# Altium PCB Two_finger_ASCII2.PcbDoc
Units mm, origin at the board's own origin, x right, y up, seen from the top; angles counter-clockwise.
Board outline 107.17 x 113.57 mm, 2 copper layers (Top Layer, Bottom Layer); 8 components, 96 nets, 204 pads, 144 vias.
Unrouted connection lines stored in the file: 96.
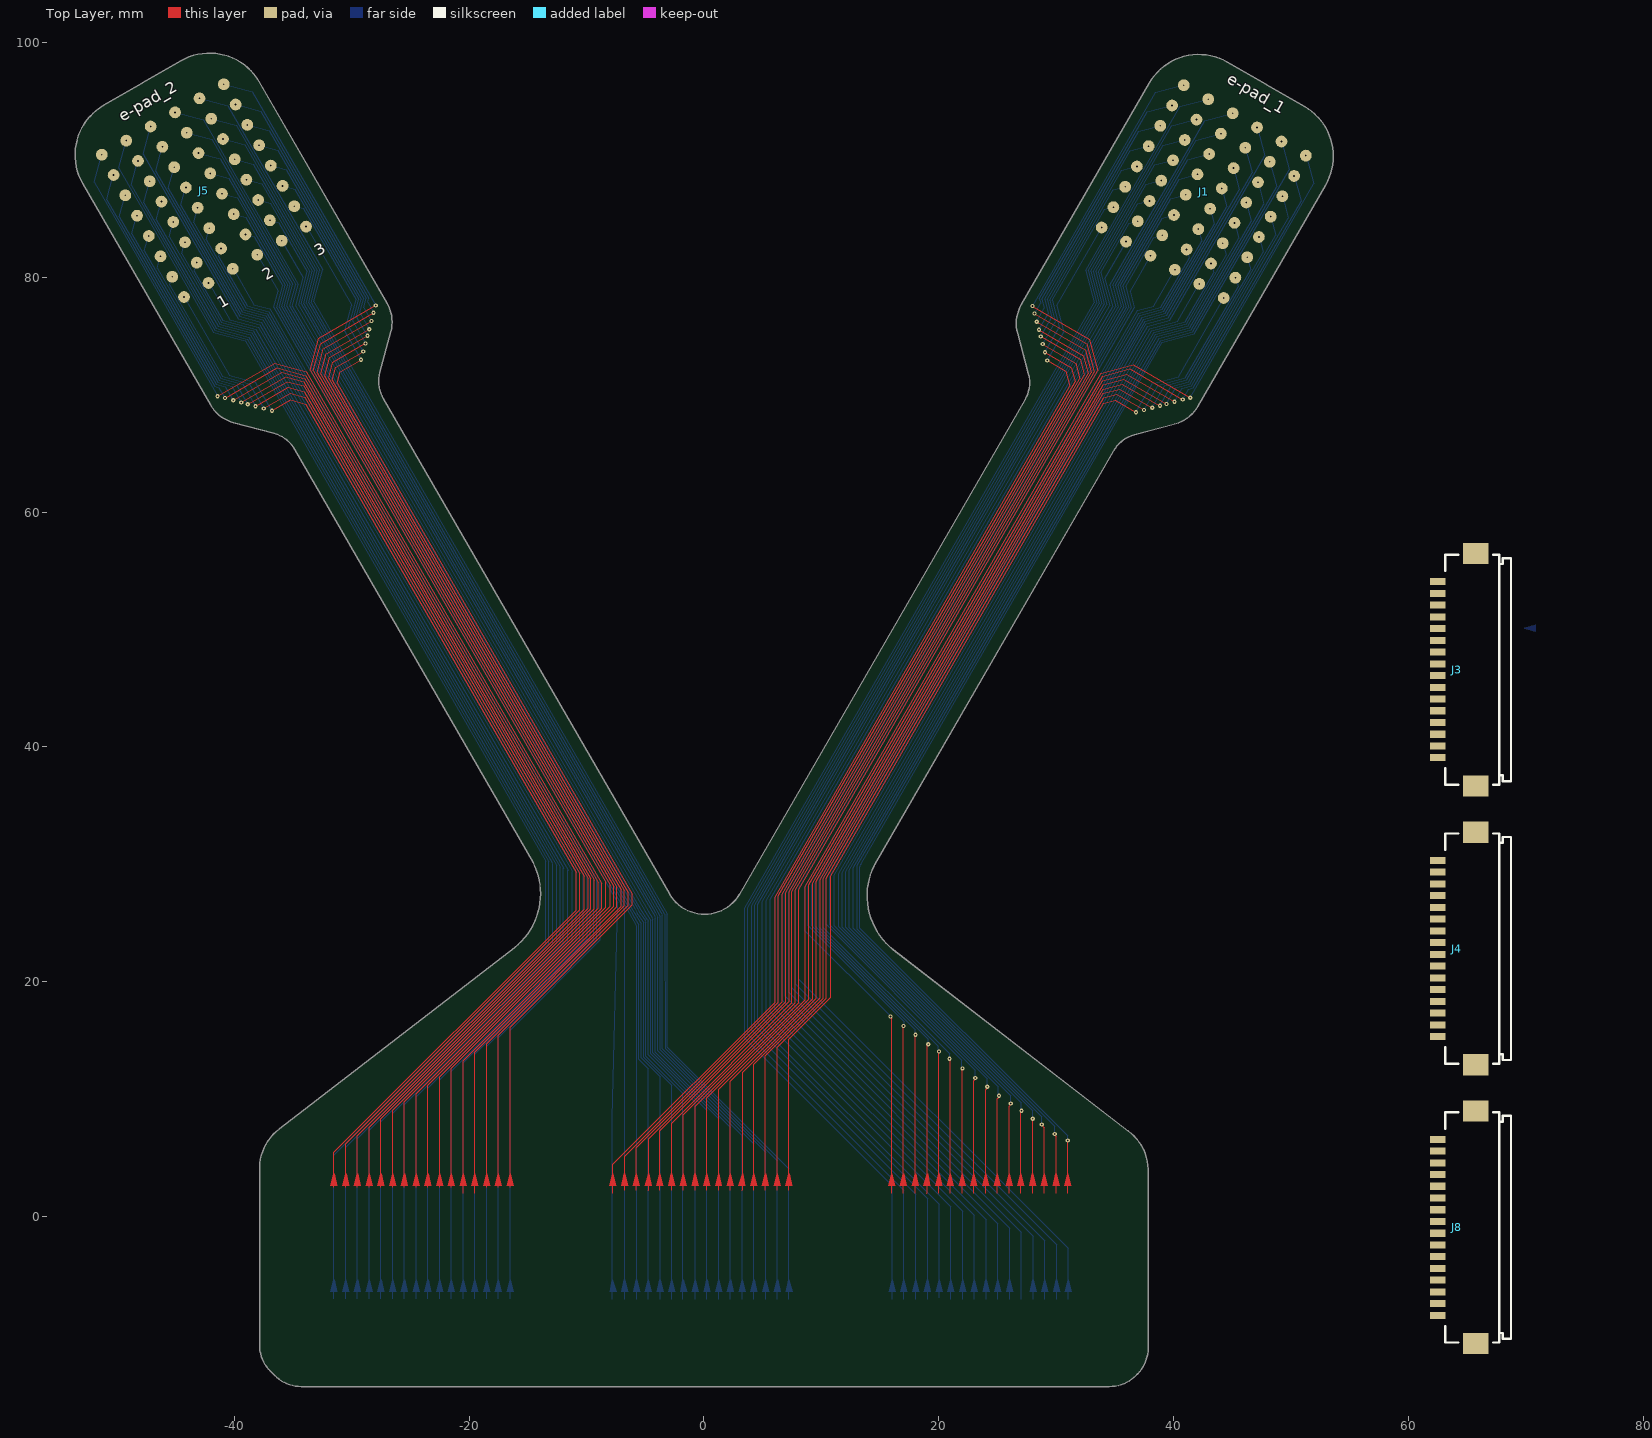
[diagram p0: Top Layer view]
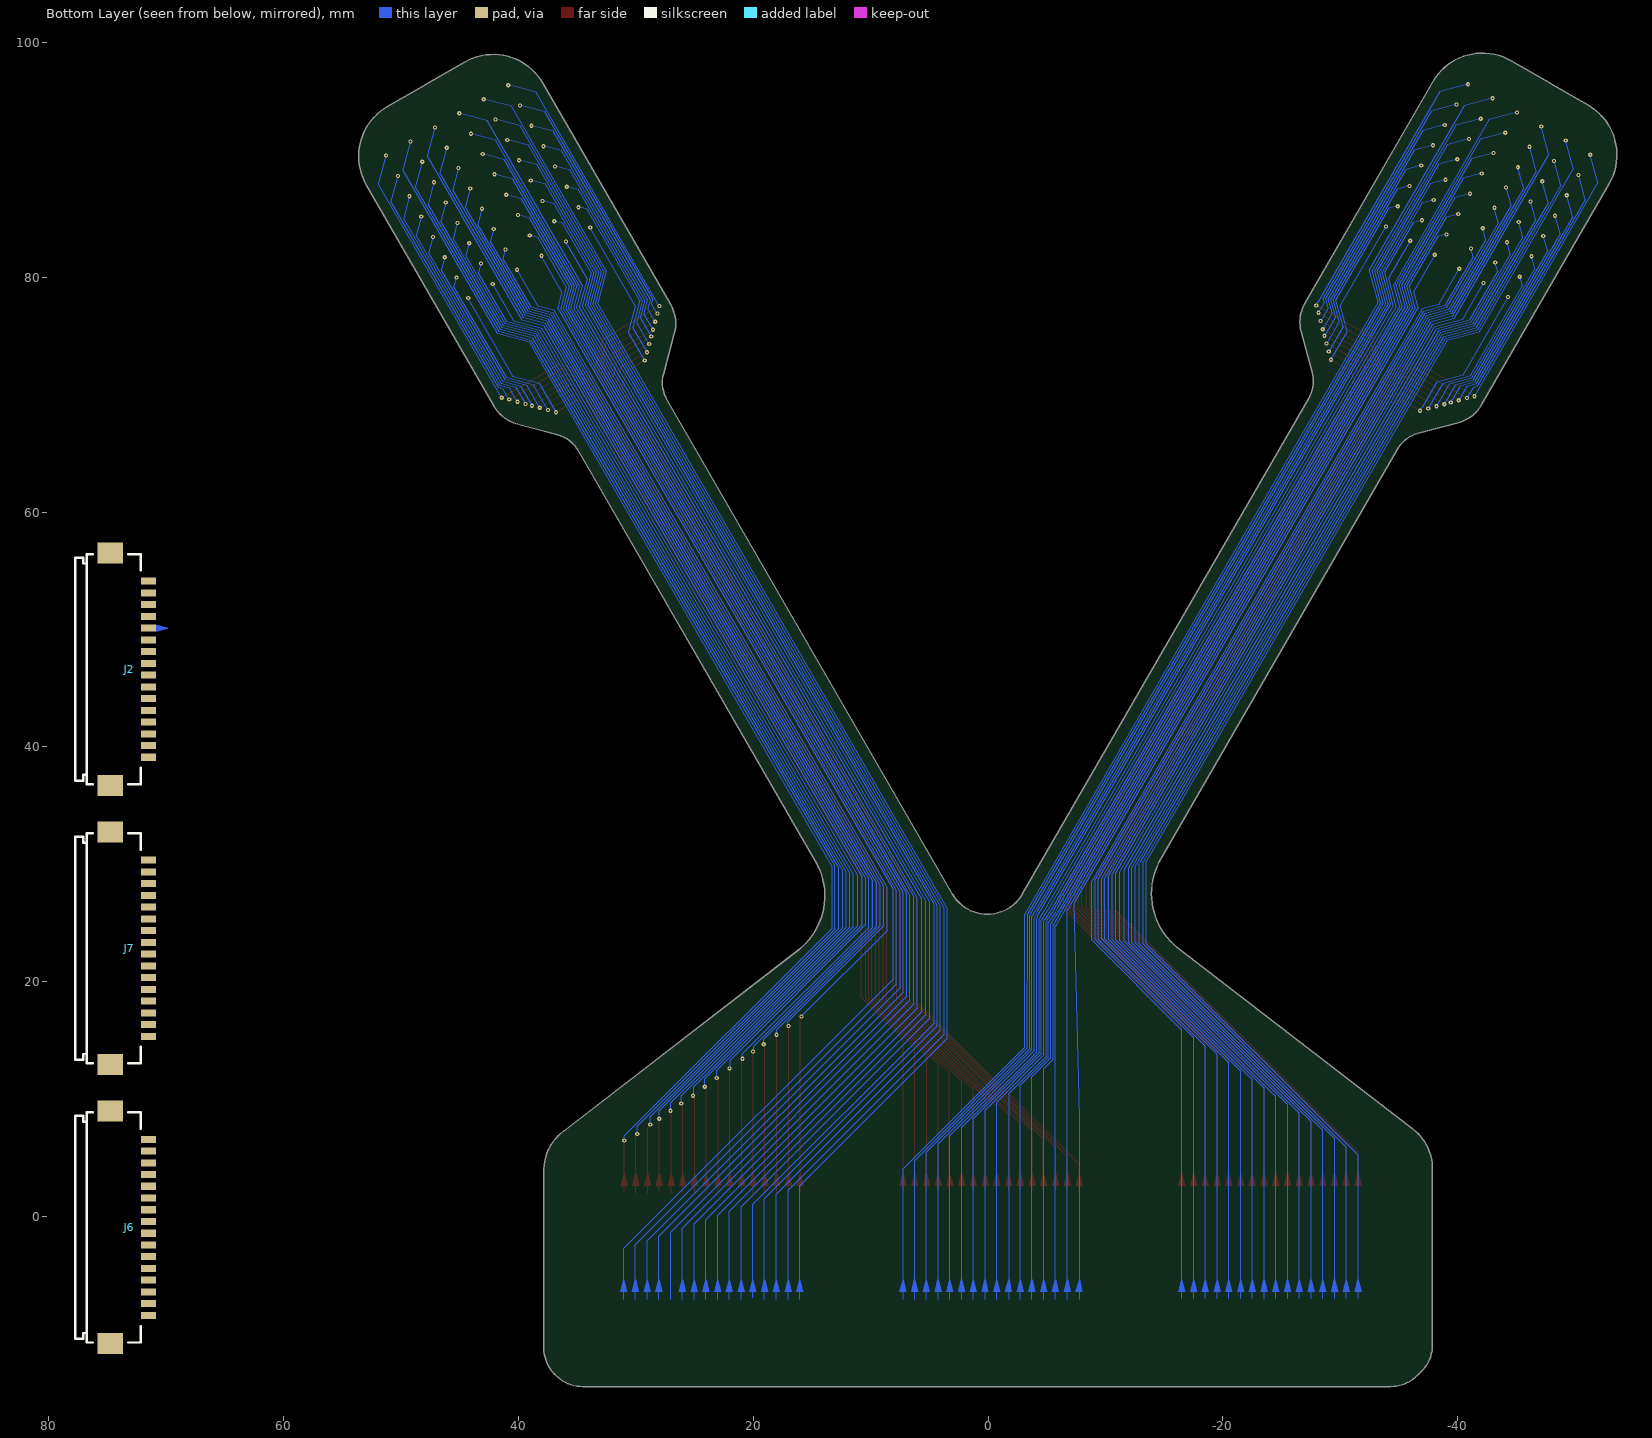
[diagram p1: Bottom Layer view, seen from below]

## Layer stack, top to bottom
Top Solder: solder mask 0.0102, Solder Resist, Dk 3.5
Top Layer: signal copper 0.0356
Dielectric 1: dielectric 0.32, FR-4, Dk 4.8
Bottom Layer: signal copper 0.0356
Bottom Solder: solder mask 0.0102, Solder Resist, Dk 3.5

## Board outline
-37.846,-10.935 ccw(c-34.684,-10.935) -36.92,-13.171 -36.548,-13.543 ccw(c-34.29,-11.285) -34.29,-14.478 -0.083,-14.478 -0.07,-14.479 34.543,-14.479 ccw(c34.543,-11.286) 36.801,-13.544 36.908,-13.437 ccw(c34.65,-11.179) 37.843,-11.192 37.844,-11.176 37.842,4.014 37.842,4.018 ccw(c33.651,3.912) 36.137,7.289 16.13,22.722 cw(c19.776,27.325) 14.505,29.913 14.553,29.983 34.89,65.207 34.89,65.208 cw(c37.435,63.738) 36.674,66.577 40.119,67.5 ccw(c39.293,70.584) 42.058,68.988 52.961,87.872 ccw(c48.749,90.304) 53.613,90.304 ccw(c48.749,90.304) 51.181,94.517 47.914,96.403 47.855,96.437 44.589,98.323 44.588,98.323 ccw(c42.156,94.111) 37.944,96.544 37.943,96.543 27.041,77.658 27.04,77.658 ccw(c29.806,76.061) 26.721,75.235 27.644,71.79 cw(c24.806,71.029) 27.745,71.029 cw(c24.806,71.029) 27.351,69.561 27.351,69.56 3.033,27.441 3.02,27.408 cw(c0.061,29.226) -2.9,27.411 -2.916,27.455 -27.292,69.675 -27.292,69.676 cw(c-24.747,71.145) -27.585,71.905 -27.585,71.906 -26.662,75.35 -26.662,75.351 ccw(c-29.747,76.177) -26.553,76.177 ccw(c-29.747,76.177) -26.981,77.774 -37.884,96.658 -37.884,96.659 ccw(c-42.097,94.226) -44.529,98.439 -47.796,96.553 -47.855,96.519 -51.122,94.633 -51.122,94.632 ccw(c-48.69,90.42) -52.902,87.988 -41.999,69.103 ccw(c-39.234,70.7) -40.06,67.615 -36.615,66.692 cw(c-37.376,63.854) -34.831,65.324 -34.831,65.323 -14.521,30.146 -14.508,30.091 cw(c-19.78,27.503) -13.907,27.503 cw(c-19.78,27.503) -16.133,22.9 -36.131,7.474 -36.149,7.46 ccw(c-33.654,4.09) -37.846,4.195 -37.846,4.192
cut-out: -115.697,-30.044 -115.443,-30.044 -115.443,-29.79 -115.697,-29.79

## Design rules (kind name [scope] priority, off if disabled: settings)
Clearance [All] p1: gap=0.1 ignorepadtopadclearanceinfootprint=FALSE
PolygonConnect [All] p1: connectstyle=Relief reliefconductorwidth=0.254 reliefentries=4 polygonreliefangle="90 Angle" airgapwidth=0.254
RoutingVias [All] p1: holewidth=0.711 width=1.27 viastyle="Through Hole" minholewidth=0.711 minwidth=1.27 maxholewidth=0.711 maxwidth=1.27
SolderMaskExpansion [All] p1: expansion=0.102 istentingtop=FALSE
Width [All] p1: maxlimit=0.1 minlimit=0.1 preferedwidth=0.1 minimp=50.000000 maximp=50.000000 favimp=50.000000
30 further rules are at their usual default settings.

## Components (designator, comment, footprint, x,y, rotation, side; value= is the part's Value field where it differs from the comment)
J1 "48_electrode_pads" 48_ELECTRODE_PADS#1 32,69 r330 top
J2 "FH12-16S-1SH(55)" FH12-16S-1SH(55) 74.51,46.489 r90 bottom
J3 "FH12-16S-1SH(55)" FH12-16S-1SH(55) 65.493,46.703 r270 top
J4 "FH12-16S-1SH(55)" FH12-16S-1SH(55) 65.493,22.954 r270 top
J5 "48_electrode_pads" 48_ELECTRODE_PADS#2 -32.021,69.069 r30 top
J6 "FH12-16S-1SH(55)" FH12-16S-1SH(55) 74.51,-1.049 r90 bottom
J7 "FH12-16S-1SH(55)" FH12-16S-1SH(55) 74.51,22.72 r90 bottom
J8 "FH12-16S-1SH(55)" FH12-16S-1SH(55) 65.493,-0.795 r270 top

## Footprints (in the part's own frame and the unit in brackets; to place one, negate y for a bottom-side part, rotate by r counter-clockwise, add the part's x,y. Pads: shape width x height; smd on the part's side, far side on the other; paste and mask are expansions set on the pad)
48_ELECTRODE_PADS#1 [mm]
  round 1 smd: 1(-3.589,28.131) 2(-3.589,26.131) 3(-3.589,24.131) 4(-3.589,22.131) 5(-3.589,20.131) 6(-3.589,18.131) 7(-3.589,16.131) 8(-3.589,14.131) 9(-1.189,28.131) 10(-1.189,26.131) 11(-1.189,24.131) 12(-1.189,22.131) 13(-1.189,20.131) 14(-1.189,18.131) 15(-1.189,16.131) 16(-1.189,14.131) 17(3.611,28.131) 18(3.611,26.131) 19(3.611,24.131) 20(3.611,22.131) 21(3.611,20.131) 22(3.611,18.131) 23(3.611,16.131) 24(3.611,14.131) 25(1.211,28.131) 26(1.211,26.131) 27(1.211,24.131) 28(1.211,22.131) 29(1.211,20.131) 30(1.211,18.131) 31(1.211,16.131) 32(1.211,14.131) 33(-5.989,14.131) 34(-5.989,16.131) 35(-5.989,18.131) 36(-5.989,20.131) 37(-5.989,22.131) 38(-5.989,24.131) 39(-5.989,26.131) 40(-5.989,28.131) 41(6.011,28.131) 42(6.011,26.131) 43(6.011,24.131) 44(6.011,22.131) 45(6.011,20.131) 46(6.011,18.131) 47(6.011,16.131) 48(6.011,14.131)
  Top Layer lines w0.1: -1.561,-49.171 -1.561,1.053 -2.517,2.009 -4.35,2.009 ; -1.361,-48.934 -1.361,1.615 -2.263,2.517 -4.858,2.517 ; -1.161,-48.633 -1.161,2.05 -2.136,3.025 -5.366,3.025 ; -0.961,-48.396 -0.961,2.485 -1.982,3.506 -5.847,3.506 ; -0.761,-48.159 -0.761,2.793 -1.882,3.914 -6.255,3.914 ; -0.559,-48.032 -0.559,2.972 -2.009,4.422 -6.763,4.422 ; -0.359,-47.795 -0.359,3.153 -2.136,4.93 -7.271,4.93 ; -0.159,-47.605 -0.159,3.406 -2.138,5.385 -7.751,5.385 ; 0.208,-47.131 0.208,3.367 2.187,5.346 7.8,5.346 ; 0.408,-46.831 0.408,3.202 2.097,4.891 7.32,4.891 ; 0.608,-46.53 0.608,2.894 2.097,4.383 6.812,4.383 ; 0.81,-46.247 0.81,2.588 2.097,3.875 6.304,3.875 ; 1.01,-45.946 1.01,2.28 2.198,3.468 5.896,3.468 ; 1.21,-45.773 1.21,1.972 2.224,2.986 5.415,2.986 ; 1.41,-45.582 1.41,1.664 2.224,2.478 4.907,2.478 ; 1.647,-45.282 1.647,1.266 2.351,1.97 4.399,1.97
  Bottom Layer lines w0.1: -3.334,-51.274 -3.334,8.278 -5.331,10.275 -5.331,26.414 -3.601,28.143 -3.575,28.17 ; -3.118,-51.084 -3.118,8.345 -5.131,10.358 -5.131,24.614 -3.601,26.143 -3.575,26.17 ; -2.918,-50.809 -2.918,8.428 -4.931,10.441 -4.931,22.814 -3.601,24.143 -3.575,24.17 ; -2.718,-50.61 -2.718,8.51 -4.731,10.523 -4.731,21.014 -3.601,22.143 -3.575,22.17 ; -2.518,-50.419 -2.518,8.593 -4.531,10.606 -4.531,19.214 -3.601,20.143 -3.575,20.17 ; -2.318,-50.072 -2.318,8.676 -4.331,10.689 -4.331,17.414 -3.601,18.143 -3.575,18.17 ; -2.064,-49.818 -2.064,8.705 -4.131,10.772 -4.131,15.614 -3.601,16.143 -3.575,16.17 ; -1.81,-49.518 -1.81,8.74 -3.575,10.505 -3.575,14.131 -3.575,14.17 ; -1.561,-49.217 -1.561,8.873 -2.918,10.229 -2.918,26.414 -1.195,28.137 -1.162,28.17 ; -1.359,-48.98 -1.359,8.978 -2.718,10.337 -2.718,24.614 -1.195,26.137 -1.162,26.17 ; -1.159,-48.68 -1.159,9.105 -2.518,10.464 -2.518,22.814 -1.195,24.137 -1.162,24.17 ; -0.959,-48.443 -0.959,9.188 -2.318,10.547 -2.318,21.014 -1.195,22.137 -1.162,22.17 ; -0.759,-48.206 -0.759,9.271 -2.118,10.63 -2.118,19.214 -1.195,20.137 -1.162,20.17 ; -0.559,-48.032 -0.559,9.353 -1.918,10.712 -1.918,17.414 -1.195,18.137 -1.162,18.17 ; -0.359,-47.732 -0.359,9.436 -1.718,10.795 -1.718,15.614 -1.195,16.137 -1.162,16.17 ; -0.159,-47.541 -0.159,9.603 -1.162,10.606 -1.162,14.131 -1.162,14.17 ; 0.208,-47.178 0.208,9.564 1.211,10.567 1.211,14.131 ; 0.408,-46.941 0.408,9.398 1.767,10.757 1.767,15.575 1.211,16.131 ; 0.608,-46.704 0.608,9.315 1.967,10.674 1.967,17.375 1.211,18.131 ; 0.808,-46.42 0.808,9.232 2.167,10.591 2.167,19.175 1.211,20.131 ; 1.008,-46.056 1.008,9.149 2.367,10.508 2.367,20.975 1.211,22.131 ; 1.208,-45.756 1.208,9.066 2.567,10.425 2.567,22.775 1.211,24.131 ; 1.408,-45.582 1.408,8.939 2.767,10.298 2.767,24.575 1.211,26.131 ; 1.61,-45.345 1.61,8.834 2.967,10.19 2.967,26.375 1.211,28.131 ; 1.859,-45.028 1.859,8.701 3.624,10.466 3.624,14.131 ; 2.113,-44.727 2.113,8.666 4.18,10.733 4.18,15.575 3.624,16.131 ; 2.367,-44.49 2.367,8.637 4.38,10.65 4.38,17.375 3.624,18.131 ; 2.567,-44.27 2.567,8.555 4.58,10.568 4.58,19.175 3.624,20.131 ; 2.767,-44.016 2.767,8.472 4.78,10.485 4.78,20.975 3.624,22.131 ; 2.967,-43.669 2.967,8.389 4.98,10.402 4.98,22.775 3.624,24.131 ; 3.167,-43.322 3.167,8.306 5.18,10.319 5.18,24.575 3.624,26.131 ; 3.383,-43.022 3.383,8.239 5.38,10.236 5.38,26.375 3.624,28.131 ; -7.751,5.385 -7.744,5.392 -7.744,26.414 -6.008,28.15 -5.988,28.17 ; -7.271,4.93 -7.271,5.958 -7.544,6.231 -7.544,24.614 -6.008,26.15 -5.988,26.17 ; -6.763,4.422 -6.763,5.732 -7.344,6.313 -7.344,22.814 -6.008,24.15 -5.988,24.17 ; -6.255,3.914 -6.255,5.507 -7.144,6.396 -7.144,21.014 -6.008,22.15 ; -5.847,3.506 -5.847,5.383 -6.944,6.479 -6.944,19.214 -6.008,20.15 -5.988,20.17 ; -5.366,3.025 -5.366,5.184 -6.744,6.562 -6.744,17.414 -6.008,18.15 -5.988,18.17 ; -4.858,2.517 -4.858,4.959 -6.544,6.645 -6.544,15.614 -6.008,16.15 -5.988,16.17 ; -4.35,2.009 -4.35,4.803 -5.988,6.441 -5.988,14.131 -5.988,14.17 ; 4.399,1.97 4.399,4.764 6.037,6.402 6.037,14.131 ; 4.907,2.478 4.907,4.92 6.593,6.606 6.593,15.575 6.037,16.131 ; -5.988,22.17 -6.008,22.15 ; 5.415,2.986 5.415,5.145 6.793,6.523 6.793,17.375 6.037,18.131 ; 5.896,3.468 5.896,5.344 6.993,6.44 6.993,19.175 6.037,20.131 ; 6.304,3.875 6.304,5.469 7.193,6.358 7.193,20.975 6.037,22.131 ; 6.812,4.383 6.812,5.694 7.393,6.275 7.393,22.775 6.037,24.131 ; 7.32,4.891 7.32,5.919 7.593,6.192 7.593,24.575 6.037,26.131 ; 7.8,5.346 7.793,5.353 7.793,26.375 6.037,28.131 ; -6.008,22.15 -6.008,22.15
48_ELECTRODE_PADS#2 [mm]
  round 1 smd: 1(-3.589,28.131) 2(-3.589,26.131) 3(-3.589,24.131) 4(-3.589,22.131) 5(-3.589,20.131) 6(-3.589,18.131) 7(-3.589,16.131) 8(-3.589,14.131) 9(-1.189,28.131) 10(-1.189,26.131) 11(-1.189,24.131) 12(-1.189,22.131) 13(-1.189,20.131) 14(-1.189,18.131) 15(-1.189,16.131) 16(-1.189,14.131) 17(3.611,28.131) 18(3.611,26.131) 19(3.611,24.131) 20(3.611,22.131) 21(3.611,20.131) 22(3.611,18.131) 23(3.611,16.131) 24(3.611,14.131) 25(1.211,28.131) 26(1.211,26.131) 27(1.211,24.131) 28(1.211,22.131) 29(1.211,20.131) 30(1.211,18.131) 31(1.211,16.131) 32(1.211,14.131) 33(-5.989,14.131) 34(-5.989,16.131) 35(-5.989,18.131) 36(-5.989,20.131) 37(-5.989,22.131) 38(-5.989,24.131) 39(-5.989,26.131) 40(-5.989,28.131) 41(6.011,28.131) 42(6.011,26.131) 43(6.011,24.131) 44(6.011,22.131) 45(6.011,20.131) 46(6.011,18.131) 47(6.011,16.131) 48(6.011,14.131)
  Top Layer lines w0.1: -7.751,5.385 -2.138,5.385 -0.159,3.406 -0.159,-46.918 ; -7.271,4.93 -2.136,4.93 -0.359,3.153 -0.359,-46.698 ; -6.763,4.422 -2.009,4.422 -0.559,2.972 -0.559,-46.351 ; -6.255,3.914 -1.882,3.914 -0.761,2.793 -0.761,-46.119 ; -5.847,3.506 -1.982,3.506 -0.961,2.485 -0.961,-45.983 ; -5.366,3.025 -2.136,3.025 -1.161,2.05 -1.161,-45.639 ; -4.858,2.517 -2.263,2.517 -1.361,1.615 -1.361,-45.275 ; -4.35,2.009 -2.517,2.009 -1.561,1.053 -1.561,-44.976 ; 4.399,1.97 2.351,1.97 1.646,1.265 1.646,-49.022 ; 4.907,2.478 2.224,2.478 1.41,1.664 1.41,-48.721 ; 5.415,2.986 2.224,2.986 1.21,1.972 1.21,-48.421 ; 5.896,3.468 2.198,3.468 1.01,2.28 1.01,-48.184 ; 6.304,3.875 2.097,3.875 0.81,2.588 0.81,-47.837 ; 6.812,4.383 2.097,4.383 0.608,2.894 0.608,-47.6 ; 7.32,4.891 2.097,4.891 0.408,3.202 0.408,-47.409 ; 7.8,5.346 2.187,5.346 0.208,3.367 0.208,-47.005
  Bottom Layer lines w0.1: -5.988,28.17 -6.008,28.15 ; -5.988,26.17 -6.008,26.15 -7.544,24.614 -7.544,6.231 -7.271,5.958 -7.271,4.93 ; -5.988,24.17 -6.008,24.15 -7.344,22.814 -7.344,6.313 -6.763,5.732 -6.763,4.422 ; -3.575,28.17 -3.601,28.143 -5.331,26.414 -5.331,10.275 -3.334,8.278 -3.334,-42.872 ; -5.988,22.17 -6.008,22.15 -7.144,21.014 -7.144,6.396 -6.255,5.507 -6.255,3.914 ; -3.575,26.17 -3.601,26.143 -5.131,24.614 -5.131,10.358 -3.118,8.345 -3.118,-43.046 ; -5.988,20.17 -6.008,20.15 -6.944,19.214 -6.944,6.479 -5.847,5.383 -5.847,3.506 ; -3.575,24.17 -3.601,24.143 -4.931,22.814 -4.931,10.441 -2.918,8.428 -2.918,-43.3 ; -1.162,28.17 -1.195,28.137 -2.918,26.414 -2.918,10.229 -1.561,8.873 -1.561,-45.04 ; -5.988,18.17 -6.008,18.15 -6.744,17.414 -6.744,6.562 -5.366,5.184 -5.366,4.644 -5.366,3.565 -5.366,3.025 ; -3.575,22.17 -3.601,22.143 -4.731,21.014 -4.731,10.523 -2.718,8.51 -2.718,-43.709 ; -1.162,26.17 -1.195,26.137 -2.718,24.614 -2.718,10.337 -1.359,8.978 -1.359,-45.253 ; -5.988,16.17 -6.008,16.15 -6.544,15.614 -6.544,6.645 -4.858,4.959 -4.858,2.517 ; -3.575,20.17 -3.601,20.143 -4.531,19.214 -4.531,10.606 -2.518,8.593 -2.518,-43.963 ; -1.162,24.17 -1.195,24.137 -2.518,22.814 -2.518,10.464 -1.159,9.105 -1.159,-45.56 ; 1.211,28.131 2.967,26.375 2.967,10.19 1.61,8.834 1.61,-50.502 ; -5.988,14.17 -5.988,14.131 -5.988,6.441 -4.35,4.803 -4.35,2.009 ; -3.575,18.17 -3.601,18.143 -4.331,17.414 -4.331,10.689 -2.318,8.676 -2.318,-44.148 ; -1.162,22.17 -1.195,22.137 ; 1.211,26.131 2.767,24.575 2.767,10.298 1.408,8.939 1.408,-50.312 ; -3.575,16.17 -3.601,16.143 -4.131,15.614 -4.131,10.772 -2.064,8.705 -2.064,-44.484 ; -1.162,20.17 -1.195,20.137 ; 1.211,24.131 2.567,22.775 2.567,10.425 1.208,9.066 1.208,-50.138 ; 3.624,28.131 5.38,26.375 5.38,10.236 3.383,8.239 3.383,-51.975 ; -3.575,14.17 -3.575,14.131 ; -1.162,18.17 -1.195,18.137 -1.918,17.414 -1.918,10.712 -0.559,9.353 -0.559,-46.224 ; 1.211,22.131 2.367,20.975 2.367,10.508 1.008,9.149 1.008,-49.948 ; 3.624,26.131 5.18,24.575 5.18,10.319 3.167,8.306 3.167,-51.785 ; -7.751,5.385 -7.744,5.392 -7.744,26.414 -6.008,28.15 ; -1.162,16.17 -1.195,16.137 -1.718,15.614 -1.718,10.795 -0.359,9.436 -0.359,-46.398 ; 1.211,20.131 2.167,19.175 2.167,10.591 0.808,9.232 0.808,-49.774 ; 3.624,24.131 4.98,22.775 4.98,10.402 2.967,8.389 2.967,-51.548 ; 6.037,28.131 7.793,26.375 7.793,5.353 7.8,5.346 ; -1.162,14.17 -1.162,14.131 ; 1.211,18.131 1.967,17.375 1.967,10.674 0.608,9.315 0.608,-49.474 ; 3.624,22.131 4.78,20.975 4.78,10.485 2.767,8.472 2.767,-51.421 ; 6.037,26.131 7.593,24.575 7.593,6.192 7.32,5.919 7.32,4.891 ; 1.211,16.131 1.767,15.575 1.767,10.757 0.408,9.398 0.408,-49.283 ; 3.624,20.131 4.58,19.175 4.58,10.568 2.567,8.555 2.567,-51.294 ; 6.037,24.131 7.393,22.775 7.393,6.275 6.812,5.694 6.812,4.383 ; 1.211,14.131 1.211,10.567 0.208,9.564 0.208,-49 ; 3.624,18.131 4.38,17.375 4.38,10.65 2.367,8.637 2.367,-51.057 ; 6.037,22.131 7.193,20.975 7.193,6.358 6.304,5.469 6.304,3.875 ; 3.624,16.131 4.18,15.575 4.18,10.733 2.113,8.666 2.113,-50.93 ; 6.037,20.131 6.993,19.175 6.993,6.44 5.896,5.344 5.896,3.468 ; 3.624,14.131 3.624,10.466 1.859,8.701 1.859,-50.739 ; 6.037,18.131 6.793,17.375 6.793,6.523 5.415,5.145 5.415,2.986 ; 6.037,16.131 6.593,15.575 6.593,6.606 4.907,4.92 4.907,2.478 ; 6.037,14.131 6.037,6.402 4.399,4.764 4.399,1.97 ; -1.81,-44.768 -1.81,8.74 -3.575,10.505 -3.575,14.131 ; -0.959,-45.876 -0.959,9.188 -2.318,10.547 -2.318,21.014 -1.195,22.137 ; -0.759,-46.034 -0.759,9.271 -2.118,10.63 -2.118,19.214 -1.195,20.137 ; -0.159,-46.698 -0.159,9.603 -1.162,10.606 -1.162,14.131 ; -6.008,28.15 -6.008,28.15 ; -1.195,22.137 -1.195,22.137 ; -1.195,20.137 -1.195,20.137 ; -3.575,14.131 -3.575,14.131 ; -1.162,14.131 -1.162,14.131
FH12-16S-1SH(55) [mm] "FH12-16S-1SH(55)"
  rect 0.6x1.3 smd: 1(7.627,-2.998) 2(6.627,-2.998) 3(5.627,-2.998) 4(4.627,-2.998) 5(3.627,-2.998) 6(2.627,-2.998) 7(1.627,-2.998) 8(0.627,-2.998) 9(-0.373,-2.998) 10(-1.373,-2.998) 11(-2.373,-2.998) 12(-3.373,-2.998) 13(-4.373,-2.998) 14(-5.373,-2.998) 15(-6.373,-2.998) 16(-7.373,-2.998)
  rect 1.8x2.2 smd: 17(10.027,0.252) 18(-9.773,0.252)
  silkscreen extent -9.67,-2.35 9.93,3.25, body extent -10.23,-3.25 10.37,3.15, height 2.04

## Via types
v1: diameter 0.36, hole 0.15, Top Layer to Bottom Layer, tented bottom, 96 vias
v2: diameter 0.36, hole 0.15, Top Layer to Bottom Layer, tented both sides, 48 vias

## Nets (pads, with @x,y where several pads share a name; then routed paths per layer and width w, separated by ;. In a path a pad name is that pad's centre, name@x,y a point inside that pad or via, vN(x,y) a via of type N, cw(c..) or ccw(c..) an arc to the next point about the centre after c; other vN are vias at no path point)
NetJ1_1: J1.1 J2.16 | length 38.5
  Bottom Layer w0.1: 3.476,26.262 3.476,15.167 16.035,2.608 16.035,-7.035
  other v1: 42.957,95.157
NetJ1_2: J1.2 J2.15 | length 38.9
  Bottom Layer w0.1: 3.758,26.319 3.758,15.526 17.035,2.249 17.035,-7.035
  other v1: 41.957,93.425
NetJ1_3: J1.3 J2.14 | length 39.3
  Bottom Layer w0.1: 4.069,26.457 4.069,15.857 18.035,1.891 18.035,-7.035
  other v1: 40.957,91.693
NetJ1_4: J1.4 J2.13 | length 39.7
  Bottom Layer w0.1: 4.341,26.53 4.341,16.233 19.05,1.525 19.05,-7.035
  other v1: 39.957,89.961
NetJ1_5: J1.5 J2.12 | length 39.9
  Bottom Layer w0.1: 4.61,26.594 4.61,16.474 20.049,1.035 20.049,-6.932
  other v1: 38.957,88.229
NetJ1_6: J1.6 J2.11 | length 40.5
  Bottom Layer w0.1: 4.956,26.795 4.956,16.894 21.035,0.815 21.035,-7.035
  other v1: 37.957,86.497
NetJ1_7: J1.7 J2.10 | length 40.9
  Bottom Layer w0.1: 5.303,26.888 5.303,17.188 22.035,0.457 22.035,-7.035
  other v1: 36.957,84.765
NetJ1_8: J1.8 J2.9 | length 41.2
  Bottom Layer w0.1: 5.674,27.021 5.674,17.459 23.035,0.098 23.035,-7.035
  other v1: 35.957,83.033
NetJ1_9: J1.9 J2.8 | length 41.6
  Bottom Layer w0.1: 6.039,27.157 6.039,17.735 24.035,-0.261 24.035,-7.035
  other v1: 45.036,93.957
NetJ1_10: J1.10 J2.7 | length 42
  Bottom Layer w0.1: 6.333,27.261 6.333,18.083 25.035,-0.619 25.035,-7.035
  other v1: 44.036,92.225
NetJ1_11: J1.11 J2.6 | length 42.5
  Bottom Layer w0.1: 6.656,27.421 6.656,18.401 26.035,-0.978 26.035,-7.035
  other v1: 43.036,90.493
NetJ1_12: J1.12 J2.5 | length 42.9
  Bottom Layer w0.1: 6.948,27.527 6.948,18.75 27.035,-1.336 27.035,-7.035
  other v1: 42.036,88.761
NetJ1_13: J1.13 J2.4 | length 43.3
  Bottom Layer w0.1: 7.24,27.632 7.24,19.1 28.035,-1.695 28.035,-7.035
  other v1: 41.036,87.029
NetJ1_14: J1.14 J2.3 | length 43.6
  Bottom Layer w0.1: 7.5,27.682 7.5,19.482 29.035,-2.054 29.035,-7.035
  other v1: 40.036,85.297
NetJ1_15: J1.15 J2.2 | length 44.1
  Bottom Layer w0.1: 7.823,27.842 7.823,19.8 30.035,-2.412 30.035,-7.035
  other v1: 39.036,83.565
NetJ1_16: J1.16 J2.1 | length 44.4
  Bottom Layer w0.1: 8.092,27.907 8.092,20.229 31.035,-2.714 31.035,-7.035
  other v1: 38.036,81.833
NetJ1_17: J1.17 J3.16 | length 35.4
  Top Layer w0.1: v2(30.988,6.477) 30.988,1.989 30.995,1.982
  Bottom Layer w0.1: 13.419,30.051 13.384,30.016 13.375,30.007 13.313,29.816 13.291,29.771 13.281,29.75 13.281,29.727 13.281,24.57 30.975,6.877 30.975,6.49 v2(30.988,6.477)
  other v1: 49.193,91.557
NetJ1_18: J1.18 J3.15 | length 35
  Top Layer w0.1: v2(29.88,7.02) 29.88,6.911 29.995,6.796 29.995,1.982
  Bottom Layer w0.1: 13.081,29.899 13.081,24.488 29.88,7.689 v2(29.88,7.02) ; 13.113,29.899 13.113,29.954
  other v1: 48.193,89.825
NetJ1_19: J1.19 J3.14 | length 34.5
  Top Layer w0.1: v2(28.786,7.831) 28.786,7.781 28.995,7.572 28.995,1.982
  Bottom Layer w0.1: 12.735,29.698 12.735,24.551 28.786,8.5 v2(28.786,7.831)
  other v1: 47.193,88.093
NetJ1_20: J1.20 J3.13 | length 34
  Top Layer w0.1: 27.995,1.982 27.995,8.31 v2(28.009,8.324)
  Bottom Layer w0.1: 12.388,29.498 12.388,24.615 28.009,8.994 v2(28.009,8.324)
  other v1: 46.193,86.361
NetJ1_21: J1.21 J3.12 | length 33.6
  Top Layer w0.1: 26.995,1.982 26.995,8.961 v2(27.042,9.008)
  Bottom Layer w0.1: 12.088,29.378 12.088,24.633 27.042,9.678 v2(27.042,9.008)
  other v1: 45.193,84.629
NetJ1_22: J1.22 J3.11 | length 33.3
  Top Layer w0.1: 25.995,1.982 25.995,9.377 26.139,9.521 v2(26.139,9.629)
  Bottom Layer w0.1: 11.804,29.287 11.804,24.633 25.546,10.891 25.546,10.886 26.139,10.293 v2(26.139,9.629)
  other v1: 44.193,82.897
NetJ1_23: J1.23 J3.10 | length 33
  Top Layer w0.1: 24.995,1.982 24.995,10.028 25.146,10.179 v2(25.146,10.287)
  Bottom Layer w0.1: 11.466,29.209 11.466,24.689 25.081,11.074 25.081,10.352 v2(25.146,10.287)
  other v1: 43.193,81.165
NetJ1_24: J1.24 J3.9 | length 32.5
  Top Layer w0.1: 23.995,1.982 23.995,10.806 24.13,10.941 v2(24.13,11.049)
  Bottom Layer w0.1: 11.096,29.076 11.096,24.776 24.13,11.742 v2(24.13,11.049)
  other v1: 42.193,79.433
NetJ1_25: J1.25 J3.8 | length 32.1
  Top Layer w0.1: 22.995,1.982 22.995,11.584 23.111,11.7 v2(23.111,11.808)
  Bottom Layer w0.1: 10.722,28.925 10.722,24.867 23.111,12.478 v2(23.111,11.808)
  other v1: 47.114,92.757
NetJ1_26: J1.26 J3.7 | length 31.6
  Top Layer w0.1: 21.995,1.982 22.017,2.004 v2(22.017,12.619)
  Bottom Layer w0.1: 10.428,28.821 10.428,24.878 21.976,13.33 21.976,12.661 v2(22.017,12.619)
  other v1: 46.114,91.025
NetJ1_27: J1.27 J3.6 | length 31.3
  Top Layer w0.1: v2(20.923,13.43) 20.995,13.359 20.995,1.982
  Bottom Layer w0.1: 10.168,28.771 10.168,24.605 20.923,13.849 v2(20.923,13.43)
  other v1: 45.114,89.293
NetJ1_28: J1.28 J3.5 | length 30.9
  Top Layer w0.1: 19.995,1.982 20.02,2.007 v2(20.02,14.051)
  Bottom Layer w0.1: 9.845,28.61 9.845,24.645 19.979,14.511 19.979,14.092 v2(20.02,14.051)
  other v1: 44.114,87.561
NetJ1_29: J1.29 J3.4 | length 30.5
  Top Layer w0.1: 18.995,1.982 19.045,2.032 19.045,14.6 v2(19.117,14.672)
  Bottom Layer w0.1: 9.489,28.395 9.489,24.718 19.117,15.091 v2(19.117,14.672)
  other v1: 43.114,85.829
NetJ1_30: J1.30 J3.3 | length 29.9
  Top Layer w0.1: 17.995,1.982 18.023,2.01 v2(18.023,15.483)
  Bottom Layer w0.1: 9.174,28.25 9.174,24.75 18.024,15.901 v2(18.023,15.483) v2(18.023,15.483)
  other v1: 42.114,84.097
NetJ1_31: J1.31 J3.2 | length 29.6
  Top Layer w0.1: v2(16.992,16.23) 16.995,16.227 16.995,1.982
  Bottom Layer w0.1: 8.883,28.145 8.883,24.759 17.07,16.572 17.07,16.489 17.069,16.488 17.069,16.307 v2(16.992,16.23)
  other v1: 41.114,82.365
NetJ1_32: J1.32 J3.1 | length 29.1
  Top Layer w0.1: v2(15.898,17.041) 15.898,16.933 15.995,16.836 15.995,1.982
  Bottom Layer w0.1: 8.591,28.039 8.591,24.349 v2(15.898,17.041)
  other v1: 40.114,80.633
NetJ1_33: J1.33 J4.1 | length 30.9
  Top Layer w0.1: -7.754,1.982 -7.754,4.438 6.062,18.254 6.062,27.197
  other v1: 33.879,84.233
  other v2: 29.237,72.915
NetJ1_34: J1.34 J4.2 | length 30.5
  Top Layer w0.1: -6.754,2.236 -6.754,5.155 6.354,18.263 6.354,27.303
  other v1: 34.879,85.965
  other v2: 29.051,73.609
NetJ1_35: J1.35 J4.3 | length 30.4
  Top Layer w0.1: -5.754,2.236 -5.754,5.872 6.677,18.304 6.677,27.463
  other v1: 35.879,87.697
  other v2: 28.866,74.303
NetJ1_36: J1.36 J4.4 | length 30.2
  Top Layer w0.1: -4.754,2.236 -4.699,2.291 -4.699,6.644 6.969,18.313 6.969,27.568
  other v1: 36.879,89.429
  other v2: 28.689,74.96
NetJ1_37: J1.37 J4.5 | length 30
  Top Layer w0.1: -3.754,2.236 -3.754,7.307 7.261,18.321 7.261,27.673
  other v1: 37.879,91.161
  other v2: 28.54,75.517
NetJ1_38: J1.38 J4.6 | length 29.7
  Top Layer w0.1: -2.754,2.236 -2.754,7.948 7.5,18.202 7.5,27.682
  other v1: 38.879,92.893
  other v2: 28.354,76.211
NetJ1_39: J1.39 J4.7 | length 29.5
  Top Layer w0.1: -1.754,2.236 -1.754,8.666 7.798,18.218 7.798,27.781 7.791,27.787
  other v1: 39.879,94.625
  other v2: 28.168,76.905
NetJ1_40: J1.40 J4.8 | length 29.3
  Top Layer w0.1: -0.754,2.236 -0.754,9.383 8.06,18.197 8.06,27.852
  other v1: 40.879,96.357
  other v2: 27.98,77.539
NetJ1_41: J1.41 J4.9 | length 29.3
  Top Layer w0.1: 0.246,2.236 0.246,10.1 8.614,18.468 8.614,28.08
  other v1: 51.271,90.357
  other v2: 41.428,69.73
NetJ1_42: J1.42 J4.10 | length 29.2
  Top Layer w0.1: 1.246,2.236 1.27,2.26 1.27,10.841 8.938,18.509 8.938,28.24
  other v1: 50.271,88.625
  other v2: 40.785,69.576
NetJ1_43: J1.43 J4.11 | length 29.1
  Top Layer w0.1: 2.246,2.236 2.246,11.534 9.271,18.559 9.271,28.39 9.261,28.4
  other v1: 49.271,86.893
  other v2: 40.091,69.39
NetJ1_44: J1.44 J4.12 | length 28.9
  Top Layer w0.1: 3.246,2.236 3.302,2.292 3.302,12.307 9.578,18.584 9.578,28.544
  other v1: 48.271,85.161
  other v2: 39.397,69.204
NetJ1_45: J1.45 J4.13 | length 28.8
  Top Layer w0.1: 4.246,2.236 4.246,12.969 9.902,18.624 9.902,28.704
  other v1: 47.271,83.429
  other v2: 38.84,69.055
NetJ1_46: J1.46 J4.14 | length 28.6
  Top Layer w0.1: 5.246,2.236 5.246,13.686 10.162,18.601 10.162,28.755
  other v1: 46.271,81.697
  other v2: 38.182,68.879
NetJ1_47: J1.47 J4.15 | length 28.3
  Top Layer w0.1: 6.246,2.236 6.246,14.403 10.43,18.587 10.43,28.82
  other v1: 45.271,79.965
  other v2: 37.488,68.693
NetJ1_48: J1.48 J4.16 | length 28.2
  Top Layer w0.1: 7.246,2.236 7.246,15.12 10.785,18.659 10.785,28.962
  other v1: 44.271,78.233
  other v2: 36.794,68.507
NetJ5_1: J5.1 J6.16 | length 44.7
  Bottom Layer w0.1: -31.503,-6.985 -31.503,5.2 -13.486,23.217 -13.486,30.266
  other v1: -49.195,91.637
NetJ5_2: J5.2 J6.15 | length 44.4
  Bottom Layer w0.1: -30.503,-6.985 -30.503,5.917 -13.198,23.222 -13.198,30.232
  other v1: -48.195,89.905
NetJ5_3: J5.3 J6.14 | length 43.9
  Bottom Layer w0.1: -29.503,-6.985 -29.503,6.634 -12.889,23.248 -12.889,30.063
  other v1: -47.195,88.173
NetJ5_4: J5.4 J6.13 | length 43.5
  Bottom Layer w0.1: -28.503,-6.985 -28.503,7.351 -12.52,23.334 -12.52,29.857
  other v1: -46.195,86.441
NetJ5_5: J5.5 J6.12 | length 43
  Bottom Layer w0.1: -27.503,-6.985 -27.503,8.069 -12.234,23.338 -12.234,29.729
  other v1: -45.195,84.709
NetJ5_6: J5.6 J6.11 | length 42.7
  Bottom Layer w0.1: -26.503,-6.985 -26.503,8.786 -11.969,23.32 -11.969,29.669
  other v1: -44.195,82.977
NetJ5_7: J5.7 J6.10 | length 42.3
  Bottom Layer w0.1: -25.503,-6.985 -25.503,9.503 -11.581,23.425 -11.581,29.505
  other v1: -43.195,81.245
NetJ5_8: J5.8 J6.9 | length 41.9
  Bottom Layer w0.1: -24.503,-6.985 -24.503,10.22 -11.219,23.504 -11.219,29.386
  other v1: -42.195,79.513
NetJ5_9: J5.9 J6.8 | length 41.5
  Bottom Layer w0.1: -23.503,-6.985 -23.503,10.937 -10.868,23.572 -10.868,29.275
  other v1: -47.117,92.837
NetJ5_10: J5.10 J6.7 | length 41.1
  Bottom Layer w0.1: -22.503,-6.985 -22.503,11.654 -10.585,23.572 -10.585,29.191
  other v1: -46.117,91.105
NetJ5_11: J5.11 J6.6 | length 40.7
  Bottom Layer w0.1: -21.503,-6.985 -21.503,12.372 -10.259,23.616 -10.259,29.026
  other v1: -45.117,89.373
NetJ5_12: J5.12 J6.5 | length 40.2
  Bottom Layer w0.1: -20.503,-6.985 -20.503,13.089 -9.928,23.664 -9.928,28.852
  other v1: -44.117,87.641
NetJ5_13: J5.13 J6.4 | length 39.9
  Bottom Layer w0.1: -19.503,-6.985 -19.503,13.806 -9.662,23.647 -9.662,28.823
  other v1: -43.117,85.909
NetJ5_14: J5.14 J6.3 | length 39.5
  Bottom Layer w0.1: -18.503,-6.985 -18.503,14.523 -9.393,23.633 -9.393,28.758
  other v1: -42.117,84.177
NetJ5_15: J5.15 J6.2 | length 39.2
  Bottom Layer w0.1: -17.503,-6.985 -17.503,15.24 -9.133,23.61 -9.133,28.708
  other v1: -41.117,82.445
NetJ5_16: J5.16 J6.1 | length 38.7
  Bottom Layer w0.1: -16.503,-6.985 -16.503,15.882 -8.81,23.575 -8.81,28.548
  other v1: -40.117,80.713
NetJ5_17: J5.17 J7.1 | length 37.1
  Bottom Layer w0.1: -3.104,25.749 -3.104,14.407 7.239,4.064 7.239,-7.035
  other v1: -42.96,95.237
NetJ5_18: J5.18 J7.2 | length 36.8
  Bottom Layer w0.1: -3.386,25.806 -3.335,25.749 -3.334,25.747 -3.304,14.324 6.266,4.754 6.266,-7.035
  other v1: -41.96,93.505
NetJ5_19: J5.19 J7.3 | length 36.6
  Bottom Layer w0.1: -3.678,25.911 -3.6,25.775 -3.586,25.729 -3.534,25.665 -3.534,14.271 5.266,5.471 5.266,-7.035
  other v1: -40.96,91.773
NetJ5_20: J5.20 J7.4 | length 36.3
  Bottom Layer w0.1: -3.915,25.921 -3.8,25.722 -3.786,25.646 -3.734,25.582 -3.734,14.188 4.266,6.188 4.266,-7.035
  other v1: -39.96,90.041
NetJ5_21: J5.21 J7.5 | length 36
  Bottom Layer w0.1: -4.152,25.931 -4,25.668 -3.986,25.563 -3.934,25.499 -3.934,14.106 3.266,6.894 3.266,-7.035
  other v1: -38.96,88.309
NetJ5_22: J5.22 J7.6 | length 35.8
  Bottom Layer w0.1: -4.443,26.036 -4.2,25.614 -4.186,25.48 -4.134,25.416 -4.134,14.011 2.266,7.611 2.266,-7.035
  other v1: -37.96,86.577
NetJ5_23: J5.23 J7.7 | length 35.5
  Bottom Layer w0.1: -4.727,26.019 -4.4,25.453 -4.386,25.408 -4.378,25.389 -4.334,25.333 -4.334,13.928 1.266,8.328 1.266,-7.035
  other v1: -36.96,84.845
NetJ5_24: J5.24 J7.8 | length 35.2
  Bottom Layer w0.1: -5.042,26.057 -4.619,25.382 -4.608,25.355 -4.534,25.251 -4.534,13.845 0.266,9.045 0.266,-7.035
  other v1: -35.96,83.113
NetJ5_25: J5.25 J7.9 | length 35
  Bottom Layer w0.1: -5.376,26.138 -4.803,25.283 -4.799,25.261 -4.734,25.168 -4.734,13.763 -0.734,9.751 -0.734,-7.035
  other v1: -45.039,94.037
NetJ5_26: J5.26 J7.10 | length 34.7
  Bottom Layer w0.1: -5.639,26.194 -5.536,26.015 -5.012,25.217 -4.983,25.162 -4.934,25.085 -4.934,13.668 -1.778,10.512 -1.778,-7.035
  other v1: -44.039,92.305
NetJ5_27: J5.27 J7.11 | length 34.5
  Bottom Layer w0.1: -5.906,26.252 -5.86,26.172 -5.806,26.079 -5.796,26.065 -5.711,25.918 -5.696,25.892 -5.213,25.137 -5.134,25.002 -5.134,13.585 -2.734,11.185 -2.734,-7.035
  other v1: -43.039,90.573
NetJ5_28: J5.28 J7.12 | length 34.2
  Bottom Layer w0.1: -6.175,26.317 -5.966,25.956 -5.896,25.834 -5.412,25.053 -5.334,24.919 -5.334,13.502 -3.734,11.89 -3.734,-7.035
  other v1: -42.039,88.841
NetJ5_29: J5.29 J7.13 | length 34
  Bottom Layer w0.1: -6.435,26.367 -6.072,25.738 -6.056,25.711 -5.612,24.97 -5.534,24.836 -5.534,13.408 -4.734,12.608 -4.734,-7.035
  other v1: -41.039,87.109
NetJ5_30: J5.30 J7.14 | length 33.8
  Bottom Layer w0.1: -6.758,26.527 -5.747,24.777 -5.734,24.753 -5.734,-7.035
  other v1: -40.039,85.377
NetJ5_31: J5.31 J7.15 | length 33.7
  Bottom Layer w0.1: -7.027,26.592 -6.767,26.143 -6.754,26.12 -6.754,-7.035
  other v1: -39.039,83.645
NetJ5_32: J5.32 J7.16 | length 33.8
  Bottom Layer w0.1: -7.798,-7.035 -7.798,8.362 -7.797,8.365 -7.342,26.67 -7.342,26.738
  other v1: -38.039,81.913
NetJ5_33: J5.33 J8.1 | length 35.4
  Top Layer w0.1: -31.503,2.49 -31.503,5.454 -10.886,26.071 -10.886,29.338
  other v1: -44.274,78.313
  other v2: -36.793,68.634
NetJ5_34: J5.34 J8.2 | length 34.9
  Top Layer w0.1: -30.503,2.49 -30.48,2.513 -30.48,6.194 -10.563,26.111 -10.563,29.179
  other v1: -45.274,80.045
  other v2: -37.487,68.82
NetJ5_35: J5.35 J8.3 | length 34.5
  Top Layer w0.1: -29.503,2.49 -29.503,6.888 -10.208,26.184 -10.208,28.964
  other v1: -46.274,81.777
  other v2: -38.181,69.006
NetJ5_36: J5.36 J8.4 | length 34
  Top Layer w0.1: -28.503,2.49 -28.503,7.605 -9.863,26.246 -9.863,28.766
  other v1: -47.274,83.509
  other v2: -38.838,69.182
NetJ5_37: J5.37 J8.5 | length 33.7
  Top Layer w0.1: -27.503,2.49 -27.503,8.323 -9.621,26.204 -9.621,28.748
  other v1: -48.274,85.241
  other v2: -39.395,69.331
NetJ5_38: J5.38 J8.6 | length 33.3
  Top Layer w0.1: -26.503,2.49 -26.503,9.04 -9.33,26.213 -9.33,28.648
  other v1: -49.274,86.973
  other v2: -40.089,69.517
NetJ5_39: J5.39 J8.7 | length 32.8
  Top Layer w0.1: -25.503,2.49 -25.503,9.757 -8.983,26.277 -8.983,28.448
  other v1: -50.274,88.705
  other v2: -40.783,69.703
NetJ5_40: J5.40 J8.8 | length 32.4
  Top Layer w0.1: -24.503,2.49 -24.503,10.474 -8.7,26.277 -8.7,28.358
  other v1: -51.274,90.437
  other v2: -41.426,69.857
NetJ5_41: J5.41 J8.9 | length 32.3
  Top Layer w0.1: -23.503,2.49 -23.503,11.191 -8.342,26.352 -8.342,28.463
  other v1: -40.882,96.437
  other v2: -27.94,77.599
NetJ5_42: J5.42 J8.10 | length 31.7
  Top Layer w0.1: -22.503,2.49 -22.503,11.908 -7.964,26.448 -7.964,28.216
  other v1: -39.882,94.705
  other v2: -28.128,76.965
NetJ5_43: J5.43 J8.11 | length 31.4
  Top Layer w0.1: -21.503,2.49 -21.503,12.626 -7.695,26.433 -7.695,28.151
  other v1: -38.882,92.973
  other v2: -28.314,76.271
NetJ5_44: J5.44 J8.12 | length 31.5
  Top Layer w0.1: -20.503,1.982 -20.503,13.279 -7.401,26.381 -7.401,28.047
  other v1: -37.882,91.241
  other v2: -28.5,75.577
NetJ5_45: J5.45 J8.13 | length 31
  Top Layer w0.1: -19.503,1.982 -19.503,13.996 -7.055,26.445 -7.055,27.846
  other v1: -36.882,89.509
  other v2: -28.649,75.02
NetJ5_46: J5.46 J8.14 | length 30.1
  Top Layer w0.1: -18.503,2.49 -18.503,14.713 -6.763,26.453 -6.763,27.741
  other v1: -35.882,87.777
  other v2: -28.825,74.363
NetJ5_47: J5.47 J8.15 | length 29.7
  Top Layer w0.1: -17.503,2.49 -17.503,15.43 -6.439,26.494 -6.439,27.581
  other v1: -34.882,86.045
  other v2: -29.011,73.669
NetJ5_48: J5.48 J8.16 | length 29.3
  Top Layer w0.1: -16.503,2.49 -16.503,16.136 -6.085,26.554 -6.085,27.438
  other v1: -33.882,84.313
  other v2: -29.197,72.975
pads on no net: J2.17 J2.18 J3.17 J3.18 J4.17 J4.18 J6.17 J6.18 J7.17 J7.18 J8.17 J8.18

## Silkscreen, mask and mechanical layers (free items; w line width, h text height)
Top Overlay:
  text "e-pad_1" at 44.445,96.611 h1 r330
  text "e-pad_2" at -49.514,93.208 h1 r30
  text "3" at -32.837,81.743 h1 r30
  text "2" at -37.282,79.711 h1 r30
  text "1" at -41.092,77.298 h1 r30
Mechanical 13:
  lines w0.3: -44.529,98.439 cw(c-42.097,94.226) -37.884,96.659 -37.884,96.658 -26.981,77.774 cw(c-29.747,76.177) -26.553,76.177 cw(c-29.747,76.177) -26.662,75.351 -26.662,75.35 -27.585,71.906 ; -44.529,98.439 -47.796,96.553 -47.855,96.519 -51.122,94.633 -51.122,94.632 ccw(c-48.69,90.42) -52.902,87.988 -41.999,69.103 -41.999,69.103 ccw(c-39.234,70.7) -40.06,67.615 ; -44.529,98.439 -44.529,98.439 ; -40.06,67.615 -36.615,66.692 ; -40.06,67.615 -40.06,67.615 ; -36.615,66.692 cw(c-37.376,63.854) -34.831,65.324 ; -36.615,66.692 -36.615,66.692 ; -34.831,65.323 -14.521,30.146 -14.508,30.091 cw(c-19.78,27.503) -13.907,27.503 cw(c-19.78,27.503) -16.133,22.9 -36.131,7.474 -36.149,7.46 ccw(c-33.654,4.09) -37.846,4.195 -37.846,4.192 -37.846,-10.935 ccw(c-34.684,-10.935) -36.92,-13.171 -36.548,-13.543 ccw(c-34.29,-11.285) -34.29,-14.478 -0.083,-14.478 -0.07,-14.479 34.543,-14.479 ccw(c34.543,-11.286) 36.801,-13.544 36.908,-13.437 ccw(c34.65,-11.179) 37.843,-11.192 37.844,-11.176 37.842,4.014 37.842,4.018 ccw(c33.651,3.912) 36.137,7.289 16.13,22.722 cw(c19.776,27.325) 14.505,29.913 14.553,29.983 34.89,65.207 34.89,65.208 cw(c37.435,63.738) 36.674,66.577 ; -34.831,65.324 -34.831,65.323 ; -27.585,71.905 ccw(c-24.747,71.145) -27.292,69.676 -27.292,69.675 -2.916,27.455 -2.9,27.411 ccw(c0.061,29.226) 3.02,27.408 3.033,27.441 27.351,69.56 27.351,69.561 ccw(c24.806,71.029) 27.745,71.029 ccw(c24.806,71.029) 27.644,71.79 ; -27.585,71.905 -27.585,71.906 ; 27.04,77.658 ccw(c29.806,76.061) 26.721,75.235 26.721,75.235 27.644,71.79 ; 27.04,77.658 27.041,77.658 ; 27.041,77.658 37.943,96.543 ; 27.644,71.79 27.644,71.79 ; 36.674,66.577 40.119,67.5 ; 36.674,66.577 36.674,66.577 ; 37.944,96.544 cw(c42.156,94.111) 44.588,98.323 ; 37.943,96.543 37.944,96.544 ; 40.119,67.5 ccw(c39.293,70.584) 42.058,68.988 52.961,87.872 ; 40.119,67.5 40.119,67.5 ; 44.588,98.323 44.589,98.323 ; 44.589,98.323 47.855,96.437 47.914,96.403 51.181,94.517 cw(c48.749,90.304) 53.613,90.304 cw(c48.749,90.304) 52.961,87.872 ; 52.961,87.872 52.961,87.872